# Altium PCB NTC_Extension_5fach.PcbDoc
Units mm, origin at the board's own origin, x right, y up, seen from the top; angles counter-clockwise.
Board outline 139.93 x 68.95 mm, 2 copper layers (Top Side, not used), stack 0.3 mm thick; 6 components, 6 nets, 32 pads, 0 vias.
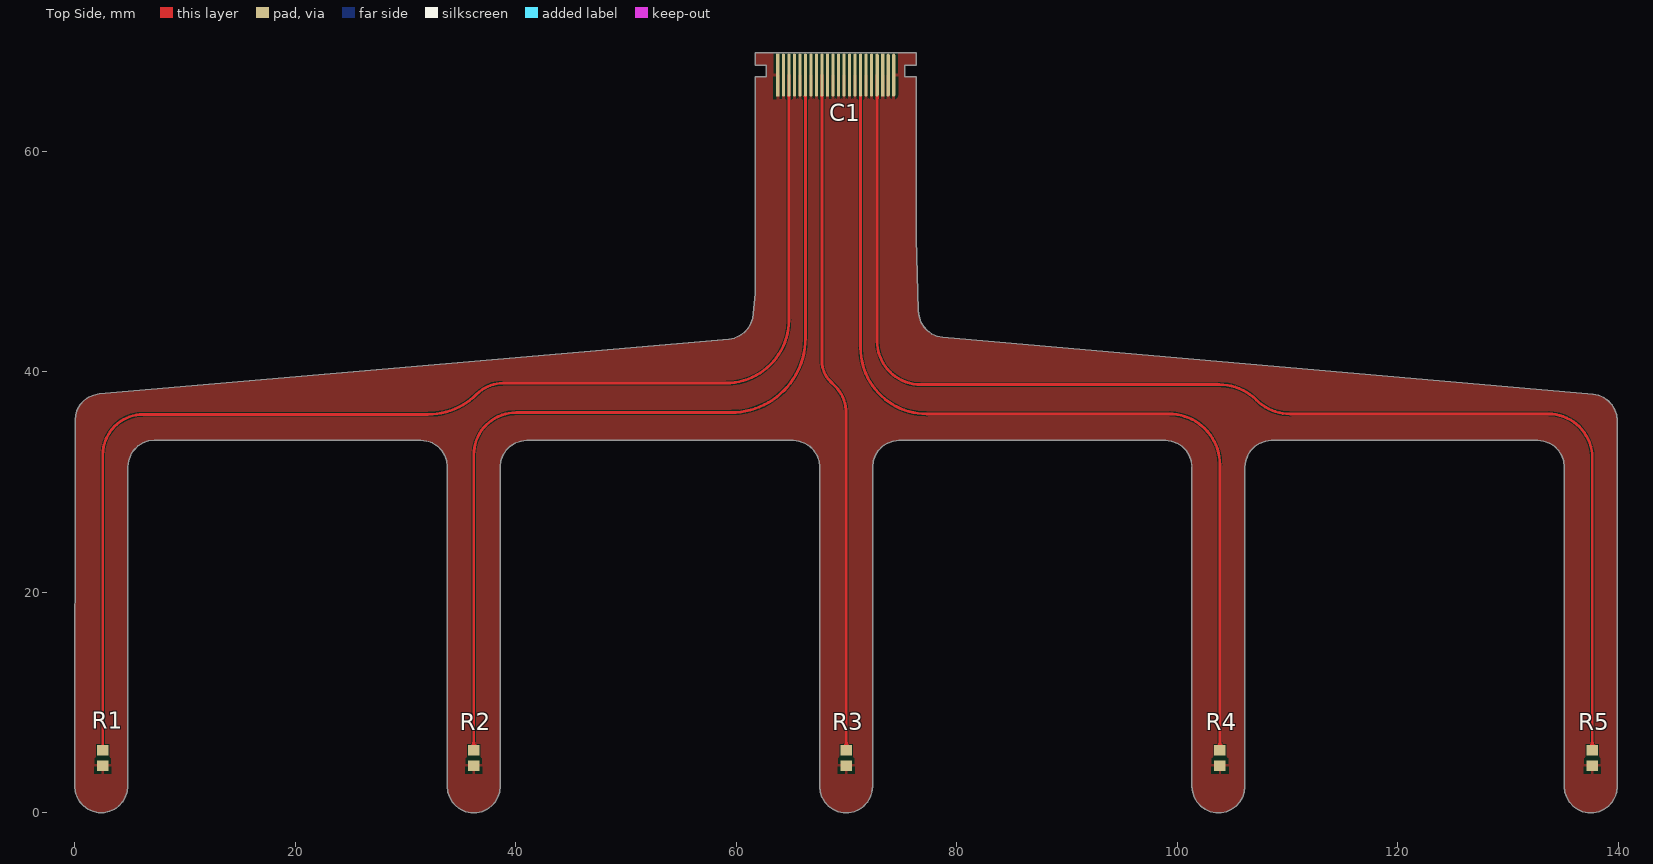
[diagram p0: Top Side view]
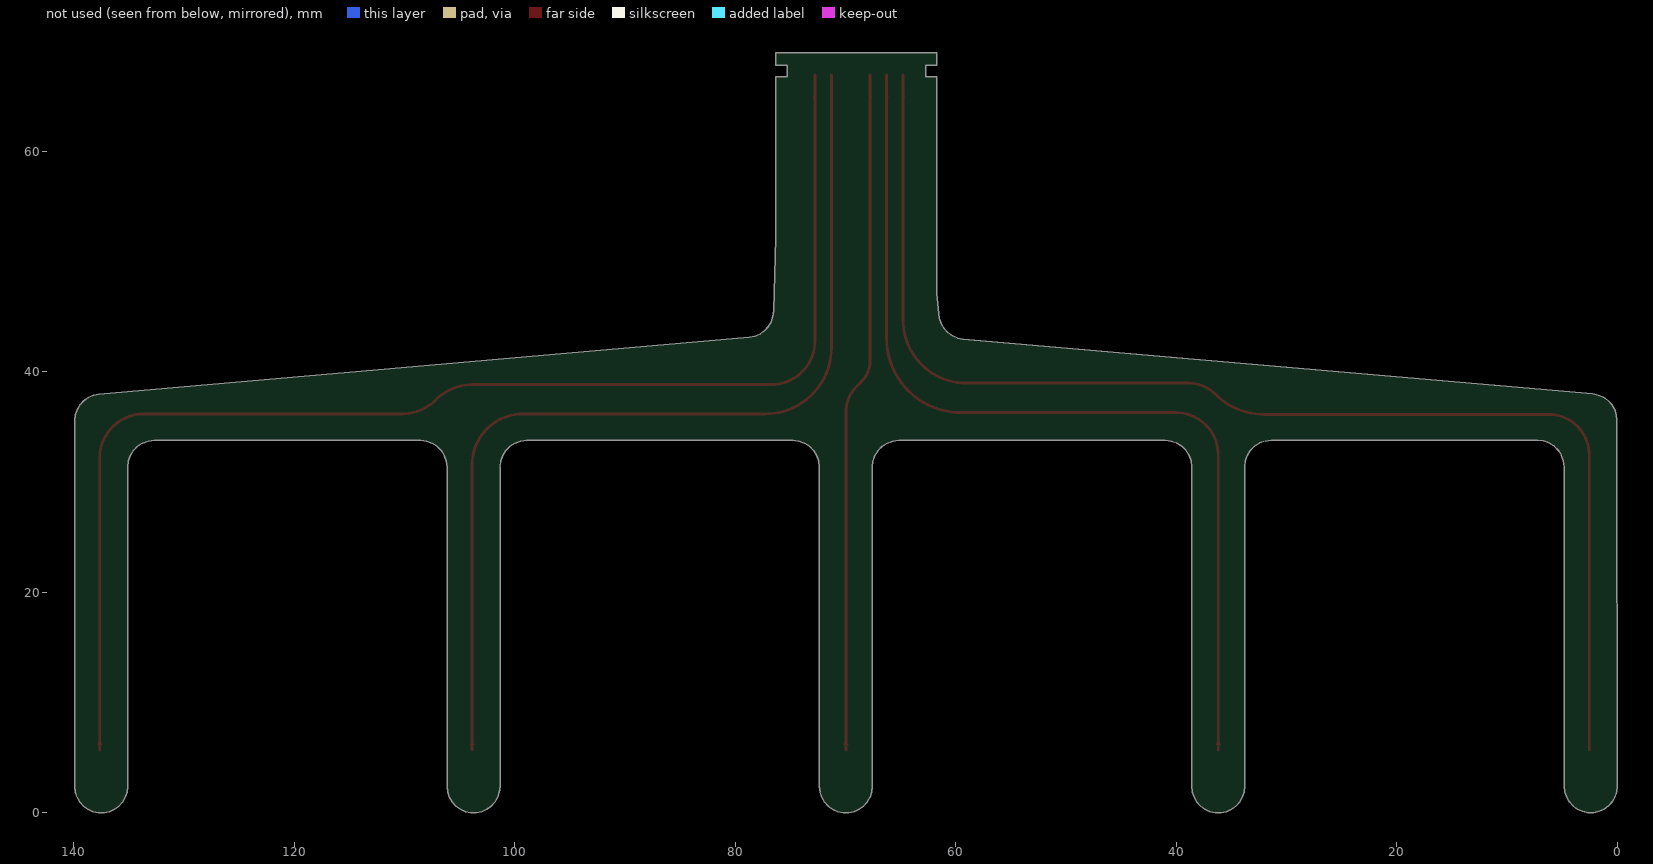
[diagram p1: not used view, seen from below]

## Layer stack, top to bottom
flexible Soldermask Top: solder mask 0.015, WE-SMFlex-0001, Dk 4.3
Top Side: signal copper 0.035
Polyimide: core 0.05, WE-PI-0103, Dk 3.4
flexible Soldermask: prepreg 0.015, WE-SMFlex-0001, Dk 4.3
Adhesive: prepreg 0.05, WE-ADH-0001, Dk 4
Stiffener: core 0.15, WE-CO-0043, Dk 4.3
not used: signal copper (thickness not stored)

## Board outline
76.327,67.818 75.311,67.818 75.311,66.802 76.327,66.802 76.327,52.118 76.538,45.537 76.591,45.032 76.75,44.55 77.007,44.112 77.35,43.737 77.764,43.444 78.23,43.243 78.728,43.146 137.734,37.986 138.232,37.889 138.699,37.688 139.113,37.395 139.456,37.02 139.713,36.582 139.871,36.1 139.925,35.595 139.928,2.403 139.876,1.904 139.721,1.427 139.47,0.992 139.134,0.619 138.728,0.324 138.27,0.12 137.779,0.016 137.278,0.016 136.787,0.12 136.328,0.324 135.922,0.619 135.587,0.992 135.336,1.426 135.181,1.903 135.128,2.402 135.125,31.394 135.065,31.928 134.888,32.435 134.602,32.89 134.222,33.27 133.767,33.556 133.259,33.734 132.725,33.794 108.551,33.792 108.017,33.732 107.51,33.554 107.055,33.268 106.675,32.888 106.389,32.433 106.211,31.926 106.151,31.392 106.151,2.4 106.098,1.901 105.943,1.424 105.692,0.989 105.357,0.616 104.951,0.322 104.492,0.117 104.002,0.013 103.5,0.013 103.009,0.117 102.551,0.322 102.145,0.616 101.809,0.989 101.558,1.424 101.403,1.901 101.351,2.4 101.351,31.392 101.291,31.926 101.113,32.433 100.827,32.888 100.447,33.268 99.992,33.554 99.485,33.732 98.951,33.792 74.777,33.792 74.243,33.732 73.735,33.555 73.28,33.269 72.9,32.889 72.614,32.434 72.437,31.927 72.376,31.393 72.374,2.401 72.321,1.902 72.166,1.425 71.915,0.99 71.579,0.617 71.174,0.323 70.715,0.119 70.224,0.014 69.723,0.014 69.232,0.119 68.773,0.323 68.368,0.618 68.032,0.991 67.781,1.425 67.626,1.902 67.574,2.401 67.576,31.393 67.516,31.927 67.339,32.434 67.053,32.89 66.673,33.27 66.218,33.556 65.711,33.733 65.177,33.793 41.002,33.797 40.468,33.737 39.961,33.56 39.506,33.274 39.126,32.894 38.84,32.439 38.662,31.932 38.602,31.398 38.595,2.406 38.542,1.907 38.387,1.43 38.136,0.996 37.8,0.623 37.395,0.328 36.936,0.124 36.445,0.02 35.944,0.02 35.453,0.124 34.994,0.329 34.589,0.624 34.253,0.996 34.002,1.431 33.847,1.908 33.795,2.407 33.802,31.399 33.742,31.933 33.564,32.44 33.278,32.896 32.898,33.276 32.443,33.562 31.936,33.74 31.402,33.8 7.227,33.811 6.693,33.751 6.186,33.574 5.73,33.288 5.35,32.908 5.064,32.454 4.886,31.946 4.825,31.412 4.8,2.42 4.747,1.921 4.592,1.444 4.34,1.01 4.004,0.637 3.598,0.343 3.139,0.139 2.649,0.035 2.147,0.036 1.656,0.141 1.198,0.345 0.792,0.64 0.457,1.014 0.207,1.448 0.052,1.926 0,2.425 0.028,35.617 0.082,36.121 0.241,36.604 0.498,37.042 0.842,37.416 1.256,37.709 1.723,37.909 2.221,38.006 59.348,42.984 59.846,43.081 60.313,43.281 60.727,43.575 61.07,43.949 61.326,44.387 61.485,44.869 61.722,47.09 61.722,66.802 62.738,66.802 62.738,67.818 61.722,67.818 61.722,68.961 76.327,68.961

## Design rules (kind name [scope] priority, off if disabled: settings)
Clearance [All] p1: gap=0.1 ignorepadtopadclearanceinfootprint=FALSE
DiffPairsRouting [All] p1: maxlimit=0.254 minlimit=0.254 mostfreqgap=0.254 toplayer_minwidth=0.381 toplayer_maxwidth=0.381 toplayer_prefwidth=0.381 bottomlayer_minwidth=0.381 bottomlayer_maxwidth=0.381 bottomlayer_prefwidth=0.381 substack1={291D20B5-A589-4DCC-A0D5-CD3C578C308D} toplayer_{291d20b5-a589-4dcc-a0d5-cd3c578c308d}_minwidth=0.381 toplayer_{291d20b5-a589-4dcc-a0d5-cd3c578c308d}_maxwidth=0.381 toplayer_{291d20b5-a589-4dcc-a0d5-cd3c578c308d}_prefwidth=0.381 bottomlayer_{291d20b5-a589-4dcc-a0d5-cd3c578c308d}_minwidth=0.381 bottomlayer_{291d20b5-a589-4dcc-a0d5-cd3c578c308d}_maxwidth=0.381 bottomlayer_{291d20b5-a589-4dcc-a0d5-cd3c578c308d}_prefwidth=0.381 maxuncoupledlength=12.7
PolygonConnect PolygonConnect_1 [All vs IsNamedPolygon('GND_L01_P000')] p1: connectstyle=Relief reliefconductorwidth=0.254 reliefentries=4 polygonreliefangle="90 Angle" airgapwidth=0.254
PolygonConnect [All] p2: connectstyle=Relief reliefconductorwidth=0.254 reliefentries=4 polygonreliefangle="90 Angle" airgapwidth=0.254
RoutingVias [All] p1: holewidth=0.711 width=1.27 viastyle="Through Hole" minholewidth=0.711 minwidth=1.27 maxholewidth=0.711 maxwidth=1.27
SolderMaskExpansion [All] p1: expansion=0.102 istentingtop=FALSE
Width [All] p1: maxlimit=0.254 minlimit=0.254 preferedwidth=0.254 substack1={291D20B5-A589-4DCC-A0D5-CD3C578C308D}
29 further rules are at their usual default settings.

## Components (designator, comment, footprint, x,y, rotation, side; value= is the part's Value field where it differs from the comment)
C1 "20Pin Molex FPC" "Molex 20 Pin FPC" 63.786,66.929 r0 top
R1 "ERT-J1VR103J" RESC1608X90X30ML15T20 2.54,5 r90 top
R2 "ERT-J1VR103J" RESC1608X90X30ML15T20 36.195,5 r90 top
R3 "ERT-J1VR103J" RESC1608X90X30ML15T20 69.977,5 r90 top
R4 "ERT-J1VR103J" RESC1608X90X30ML15T20 103.886,5 r90 top
R5 "ERT-J1VR103J" RESC1608X90X30ML15T20 137.668,5 r90 top

## Footprints (in the part's own frame and the unit in brackets; to place one, negate y for a bottom-side part, rotate by r counter-clockwise, add the part's x,y. Pads: shape width x height; smd on the part's side, far side on the other; paste and mask are expansions set on the pad)
"Molex 20 Pin FPC" [mm]
  oval 0.3x3.9 smd: 1(0.5,0) 2(1,0) 3(1.5,0) 4(2,0) 5(2.5,0) 6(3,0) 7(3.5,0) 8(4,0) 10(5,0) 11(5.5,0) 12(6,0) 13(6.5,0) 14(7,0) 15(7.5,0) 16(8,0) 17(8.5,0) 18(9,0) 20(10,0) GND(10.5,0)
  rect 0.3x3.9 smd: 9(4.5,0) 19(9.5,0) GND(0,0)
RESC1608X90X30ML15T20 [mm] "Chip Resistor, 2-Leads, Body 1.60x0.80mm, IPC Low Density"
  rect 0.95x1.05 smd: 1(-0.7,0) 2(0.7,0)
  body extent -0.88,-0.48 0.87,0.48, height 0.9

## Part data
C1: "Flex PCB part for the Molex 20pin FCC"
R1 R2 R3 R4 R5: library part CMP-2000-00869-1, Manufacturer=Panasonic, Part Number=ERT-J1VR103J

## Nets (pads, with @x,y where several pads share a name; then routed paths per layer and width w, separated by ;. In a path a pad name is that pad's centre, name@x,y a point inside that pad or via, vN(x,y) a via of type N, cw(c..) or ccw(c..) an arc to the next point about the centre after c; other vN are vias at no path point)
GND: C1.1 C1.3 C1.4 C1.6 C1.7 C1.9 C1.10 C1.11 C1.12 C1.13 C1.14 C1.16 C1.17 C1.19 C1.20 C1.GND R1.1 R2.1 R3.1 R4.1 R5.1
NetC1_2: C1.2 R1.2 | length 117.4
  Top Side w0.254: R1.2 2.54,32.475 cw(c6.222,32.476) 6.222,36.158 32.041,36.158 ccw(c32.041,42.417) 36.468,37.992 cw(c38.877,35.581) 38.877,38.989 59.055,38.989 ; 59.056,38.989 ccw(c59.057,44.718) 64.786,44.72 64.786,65.129 C1.2
NetC1_5: C1.5 R2.2 | length 86.8
  Top Side w0.254: R2.2 36.195,32.475 ; 36.195,32.476 cw(c40.041,32.476) 40.041,36.322 59.546,36.322 ccw(c59.547,43.061) 66.286,43.061 C1.5
NetC1_8: C1.8 R3.2 | length 61.9
  Top Side w0.254: C1.8 67.786,41.829 67.786,40.962 ccw(c70.326,40.962) 68.53,39.166 68.979,38.717 cw(c66.57,36.308) 69.977,36.308 R3.2
NetC1_15: C1.15 R4.2 | length 89.3
  Top Side w0.254: C1.15 71.286,65.129 71.286,42.202 ccw(c77.291,42.2) 77.293,36.195 ; 77.294,36.195 99.277,36.195 cw(c99.277,31.586) 103.886,31.585 R4.2
NetC1_18: C1.18 R5.2 | length 120.7
  Top Side w0.254: C1.18 72.786,65.129 72.786,42.814 ccw(c76.74,42.813) 76.741,38.859 103.817,38.859 103.819,38.859 cw(c103.82,34.094) 107.188,37.465 ccw(c110.251,40.523) 110.255,36.195 133.674,36.195 ; 133.676,36.195 cw(c133.677,32.204) 137.668,32.2 ; R5.2 137.668,32.199

## Polygon pours and split planes (outlines as drawn)
GND on Top Side "GND_L01_P000" (solid, pour order 0): 188 vertices, not listed, extent 0,0.013 139.928,68.961